# EAGLE board L1-Right (EAGLE 7.2.0)
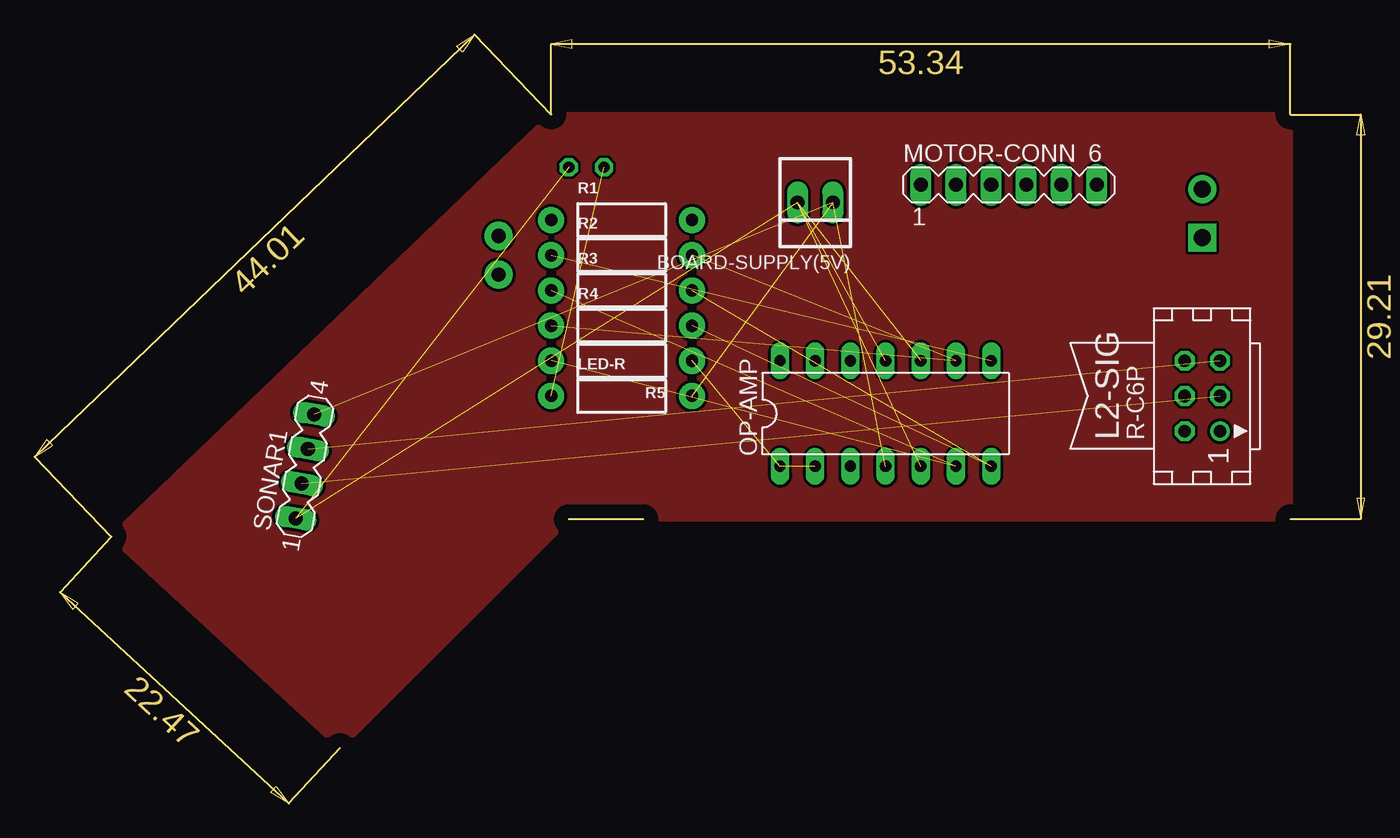
[diagram p0: board, top side]
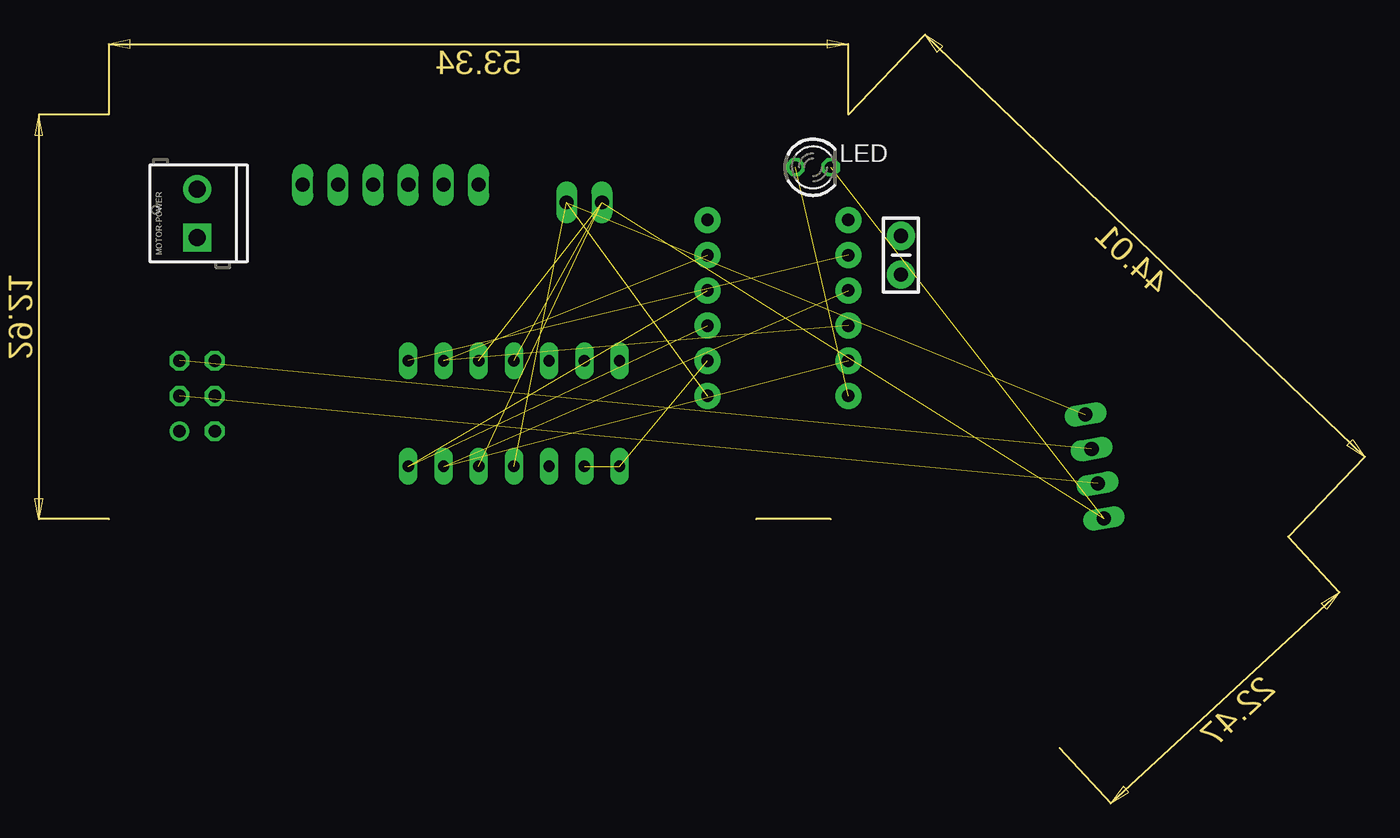
[diagram p1: board, bottom side, seen from below]

Size 96 x 55.49 mm. Coordinates in mm from the lower left corner, seen from the top.
Copper layers (1*16): Top 0.035mm / dielectric 1.5mm / Bottom 0.035mm
Design rules "default": minimum track width 10mil, minimum drill 24mil, track to track 8mil, track to pad 8mil, pad to pad 8mil, via to via 8mil, smd to smd 8mil, copper to edge 40mil, drill to drill 8mil, minimum pad ring 10mil, minimum via ring 8mil, stop-mask expansion 4mil, vias tented up to drill 0mil, thermal gap 10mil

## Footprints (pad centres in the part's own frame; a part is rotated, then mirrored left to right if it is on the bottom)
22-23-2021 = drill 1 long: 1 -1.27,0; 2 1.27,0
CAP-PTH-SMALL-KIT = drill 1.016 pad 2.032: 1 -1.397,0; 2 1.397,0
CON06 = drill 0.914: 1 -2.54,-1.27 | drill 0.914 octagon: 2 -2.54,1.27; 3 0,-1.27; 4 0,1.27; 5 2.54,-1.27; 6 2.54,1.27
LED3MM = drill 0.813 octagon: A -1.27,0; K 1.27,0
AXIAL-0.4 = drill 0.9 pad 1.88: P$1 -5.08,0; P$2 5.08,0
MA06-1 = drill 1.016 long: 1 -6.35,0; 2 -3.81,0; 3 -1.27,0; 4 1.27,0; 5 3.81,0; 6 6.35,0
SCREWTERMINAL-3.5MM-2 = drill 1.2 pad 2.032 square: 1 0,0 | drill 1.2 pad 2.032: 2 3.5,0
DIL14 = drill 0.813 long: 1 -7.62,-3.81; 2 -5.08,-3.81; 3 -2.54,-3.81; 4 0,-3.81; 5 2.54,-3.81; 6 5.08,-3.81; 7 7.62,-3.81; 8 7.62,3.81; 9 5.08,3.81; 10 2.54,3.81; 11 0,3.81; 12 -2.54,3.81; 13 -5.08,3.81; 14 -7.62,3.81
MA04-1 = drill 1.016 long: 1 -3.81,0; 2 -1.27,0; 3 1.27,0; 4 3.81,0

## Placement (x,y rotation side)
BOARD-SUPPLY(5V)  [22-23-2021]  56.33,43.38 180 top
C1  [CAP-PTH-SMALL-KIT]  33.47,39.57 90 bottom
L2-SIG  [CON06]  84.27,29.41 90 top
LED  [LED3MM]  39.82,45.92 0 bottom
LED-R  [AXIAL-0.4]  42.36,29.41 0 top
MOTOR-CONN  [MA06-1]  70.3,44.65 0 top
MOTOR-POWER  [SCREWTERMINAL-3.5MM-2]  84.27,40.84 90 bottom
OP-AMP  [DIL14]  61.41,28.14 0 top
R1  [AXIAL-0.4]  42.36,42.11 0 top
R2  [AXIAL-0.4]  42.36,39.57 0 top
R3  [AXIAL-0.4]  42.36,37.03 0 top
R4  [AXIAL-0.4]  42.36,34.49 0 top
R5  [AXIAL-0.4]  42.36,31.95 180 top
SONAR1  [MA04-1]  19.5,24.33 80 top

## Library data of the parts
BOARD-SUPPLY(5V) = con-molex
C1 LED-R R1-R5 = SparkFun-Passives
L2-SIG = con-harting
LED = led
MOTOR-CONN SONAR1 = con-lstb
MOTOR-POWER = SparkFun-Connectors
OP-AMP = 40xx

## Nets
S$1: BOARD-SUPPLY(5V).2 LED.K OP-AMP.5 OP-AMP.10 OP-AMP.11 SONAR1.1
S$2: BOARD-SUPPLY(5V).1 LED-R.P$2 OP-AMP.4 SONAR1.4
S$3: LED-R.P$1 LED.A
S$5: L2-SIG.3 SONAR1.2
S$6: L2-SIG.5 SONAR1.3
S$7: OP-AMP.1 OP-AMP.2 R5.P$1
S$8: OP-AMP.6 R3.P$1 R5.P$2
S$9: OP-AMP.7 R3.P$2 R4.P$2
S$10: OP-AMP.9 R2.P$2 R4.P$1
S$11: OP-AMP.8 R2.P$1

## Tracks (layer width: path | path; a pad name or v marks a point on that pad's centre or on a via)
L1-RIGHT
  pour Top: 90.62,49.73 37.28,49.73 5.53,19.25 22.04,4.01 38.55,20.52 90.62,20.52
S$1  (5 unrouted)
S$2  (4 unrouted)
S$3  (1 unrouted)
S$5  (1 unrouted)
S$6  (1 unrouted)
S$7  (2 unrouted)
S$8  (2 unrouted)
S$9  (2 unrouted)
S$10  (2 unrouted)
S$11  (1 unrouted)